# Altium PCB HeartBeat - Copy.PcbDoc
Units mil, origin at the board's own origin, x right, y up, seen from the top; angles counter-clockwise.
Board outline 1540 x 1895 mil, 2 copper layers (Top Layer, Bottom Layer); 2 components, 4 nets, 35 pads, 0 vias.
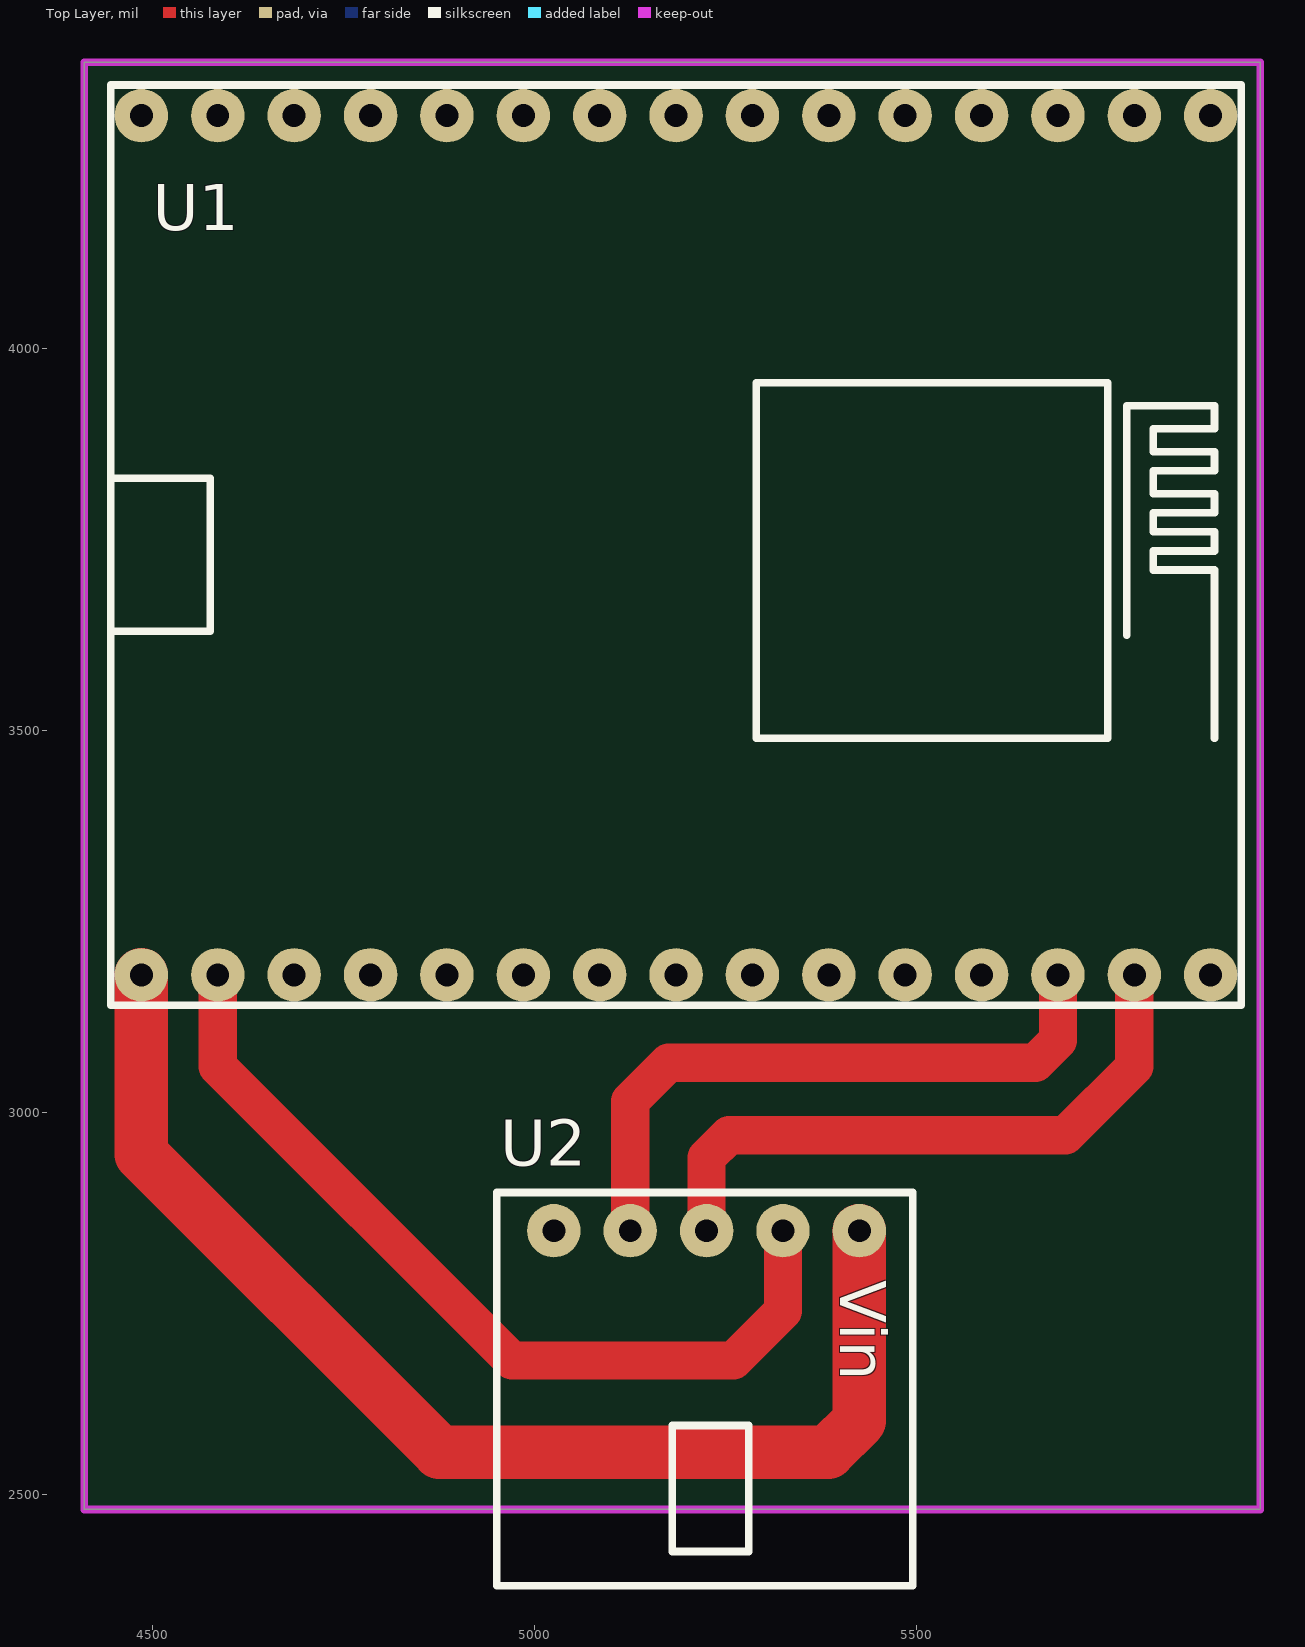
[diagram p0: Top Layer view]
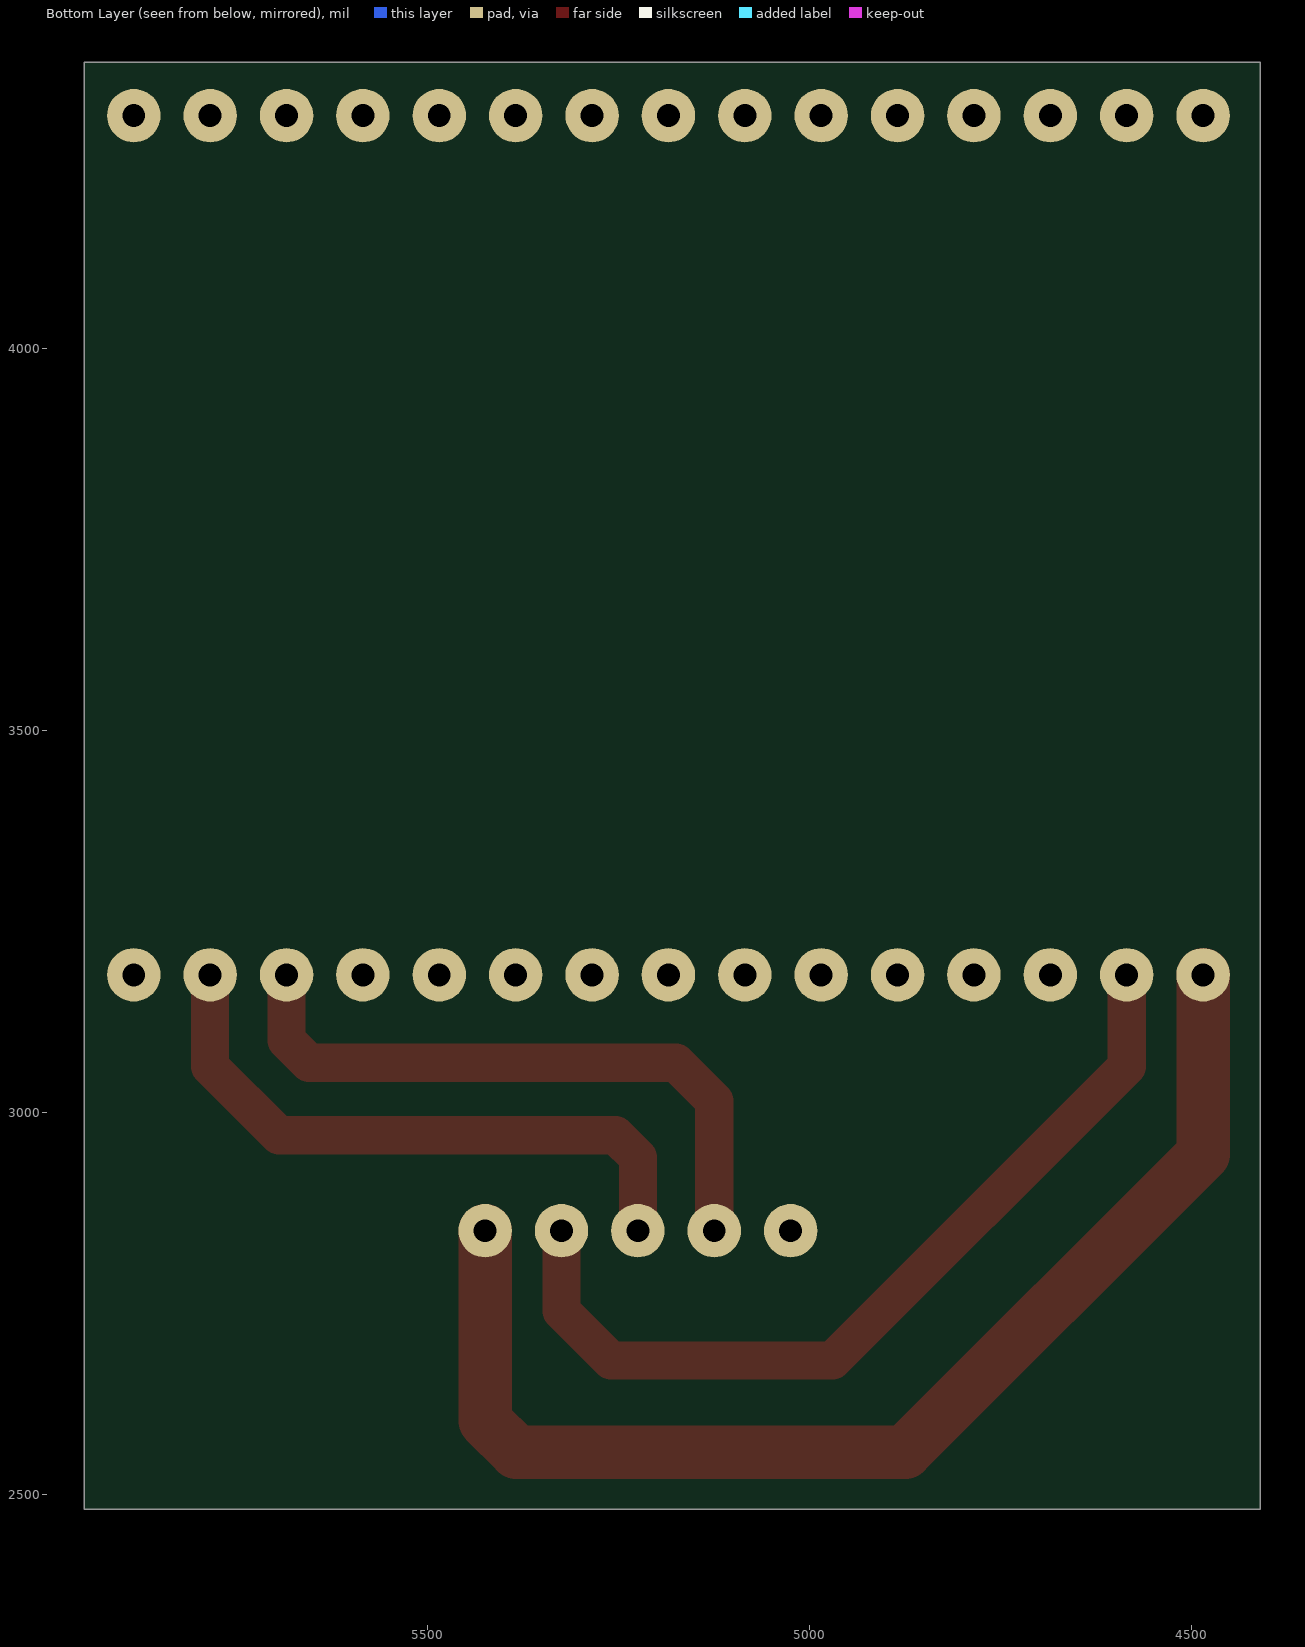
[diagram p1: Bottom Layer view, seen from below]

## Layer stack, top to bottom
Top Solder: solder mask 0.4, Solder Resist, Dk 3.5
Top Layer: signal copper 1.4
Dielectric 1: dielectric 12.6, FR-4, Dk 4.8
Bottom Layer: signal copper 1.4
Bottom Solder: solder mask 0.4, Solder Resist, Dk 3.5

## Board outline
4410,2480 5950,2480 5950,4375 4410,4375

## Design rules (kind name [scope] priority, off if disabled: settings)
Clearance Clearance_1 [InNamedPolygon('GND_L01_P001')] p1: gap=30 ignorepadtopadclearanceinfootprint=FALSE except(0: Arc-Hole Track-Hole SMDPad-Hole THPad-Hole Via-Hole Fill-Hole Poly-Hole Region-Hole Text-Hole)
Clearance [All] p2: gap=10 ignorepadtopadclearanceinfootprint=FALSE except(0: Arc-Hole Track-Hole SMDPad-Hole THPad-Hole Via-Hole Fill-Hole Poly-Hole Region-Hole Text-Hole)
DiffPairsRouting [All] p1: maxlimit=20 minlimit=20 mostfreqgap=20 toplayer_minwidth=15 toplayer_maxwidth=60 toplayer_prefwidth=20 bottomlayer_minwidth=15 bottomlayer_maxwidth=60 bottomlayer_prefwidth=20 maxuncoupledlength=500
PolygonConnect [All] p1: connectstyle=Relief reliefconductorwidth=10 reliefentries=4 polygonreliefangle="90 Angle" airgapwidth=10
RoutingVias [All] p1: holewidth=28 width=50 viastyle="Through Hole" minholewidth=28 minwidth=50 maxholewidth=28 maxwidth=50
SolderMaskExpansion [All] p1: expansion=4 istentingtop=FALSE
Width [All] p1: maxlimit=70 minlimit=50 preferedwidth=60
29 further rules are at their usual default settings.

## Classes and differential pairs
component class HeartBeat: U2

## Components (designator, comment, footprint, x,y, rotation, side; value= is the part's Value field where it differs from the comment)
U1 "ESP8266" ESP8266 5885,4305 r270 top
U2 "MAX30100" MAX30100 5425,2845 r270 top

## Footprints (in the part's own frame and the unit in brackets; to place one, negate y for a bottom-side part, rotate by r counter-clockwise, add the part's x,y. Pads: shape width x height; smd on the part's side, far side on the other; paste and mask are expansions set on the pad)
ESP8266 [mil]
  round 70 hole 30: 0(1125,0) 1(1125,-100) 2(1125,-200) 3(1125,-300) 4(1125,-400) 5(1125,-500) 6(1125,-600) 7(1125,-700) 8(1125,-800) 9(1125,-900) 10(1125,-1000) 11(1125,-1100) 12(1125,-1200) 13(1125,-1300) 14(1125,-1400) 15(0,0) 16(0,-100) 17(0,-200) 18(0,-300) 19(0,-400) 20(0,-500) 21(0,-600) 22(0,-700) 23(0,-800) 24(0,-900) 25(0,-1000) 26(0,-1100) 27(0,-1200) 28(0,-1300) 29(0,-1400)
  silkscreen extent -40,-1440 1165,40, body extent -35,-1435 1160,35, height 10
MAX30100 [mil]
  round 70 hole 30: 0(0,0) 1(0,-100) 2(0,-200) 3(0,-300) 4(0,-400)
  silkscreen extent -50,-475 465,70, body extent -50,-475 465,70, height 10

## Part data
U1: "ESP8266-12E"
U2: "MAX30100-GY"

## Nets (pads, with @x,y where several pads share a name; then routed paths per layer and width w, separated by ;. In a path a pad name is that pad's centre, name@x,y a point inside that pad or via, vN(x,y) a via of type N, cw(c..) or ccw(c..) an arc to the next point about the centre after c; other vN are vias at no path point)
+3.3V: U1.14 U2.0 | length 1602.5
  Top Layer w70: U1.14 4485,2945 4875,2555 5383.99,2555 5425,2596.01 U2.0
GND: U1.13 U2.1 | length 1151.4
  Top Layer w50: U1.13 4585,3060 4970,2675 5260,2675 5325,2740 U2.1
SCL: U1.1 U2.2 | length 825.1
  Top Layer w50: U2.2 5225,2940.71 5254.29,2970 5695,2970 5785,3060 U1.1
SDA: U1.2 U2.3 | length 848.6
  Top Layer w50: U2.3 5125,3015 5175,3065 5655.71,3065 5685,3094.29 U1.2
pads on no net: U1.0 U1.3 U1.4 U1.5 U1.6 U1.7 U1.8 U1.9 U1.10 U1.11 U1.12 U1.15 U1.16 U1.17 U1.18 U1.19 U1.20 U1.21 U1.22 U1.23 U1.24 U1.25 U1.26 U1.27 U1.28 U1.29 U2.4

## Keep-outs
Top Layer:
  the board outline again, w10

## Text inside footprints (layer, text, board x,y; h text height)
U2: Top Overlay "Vin" at 5400,2780 h60 r270